# EAGLE board QED_2550 (EAGLE 5.11)
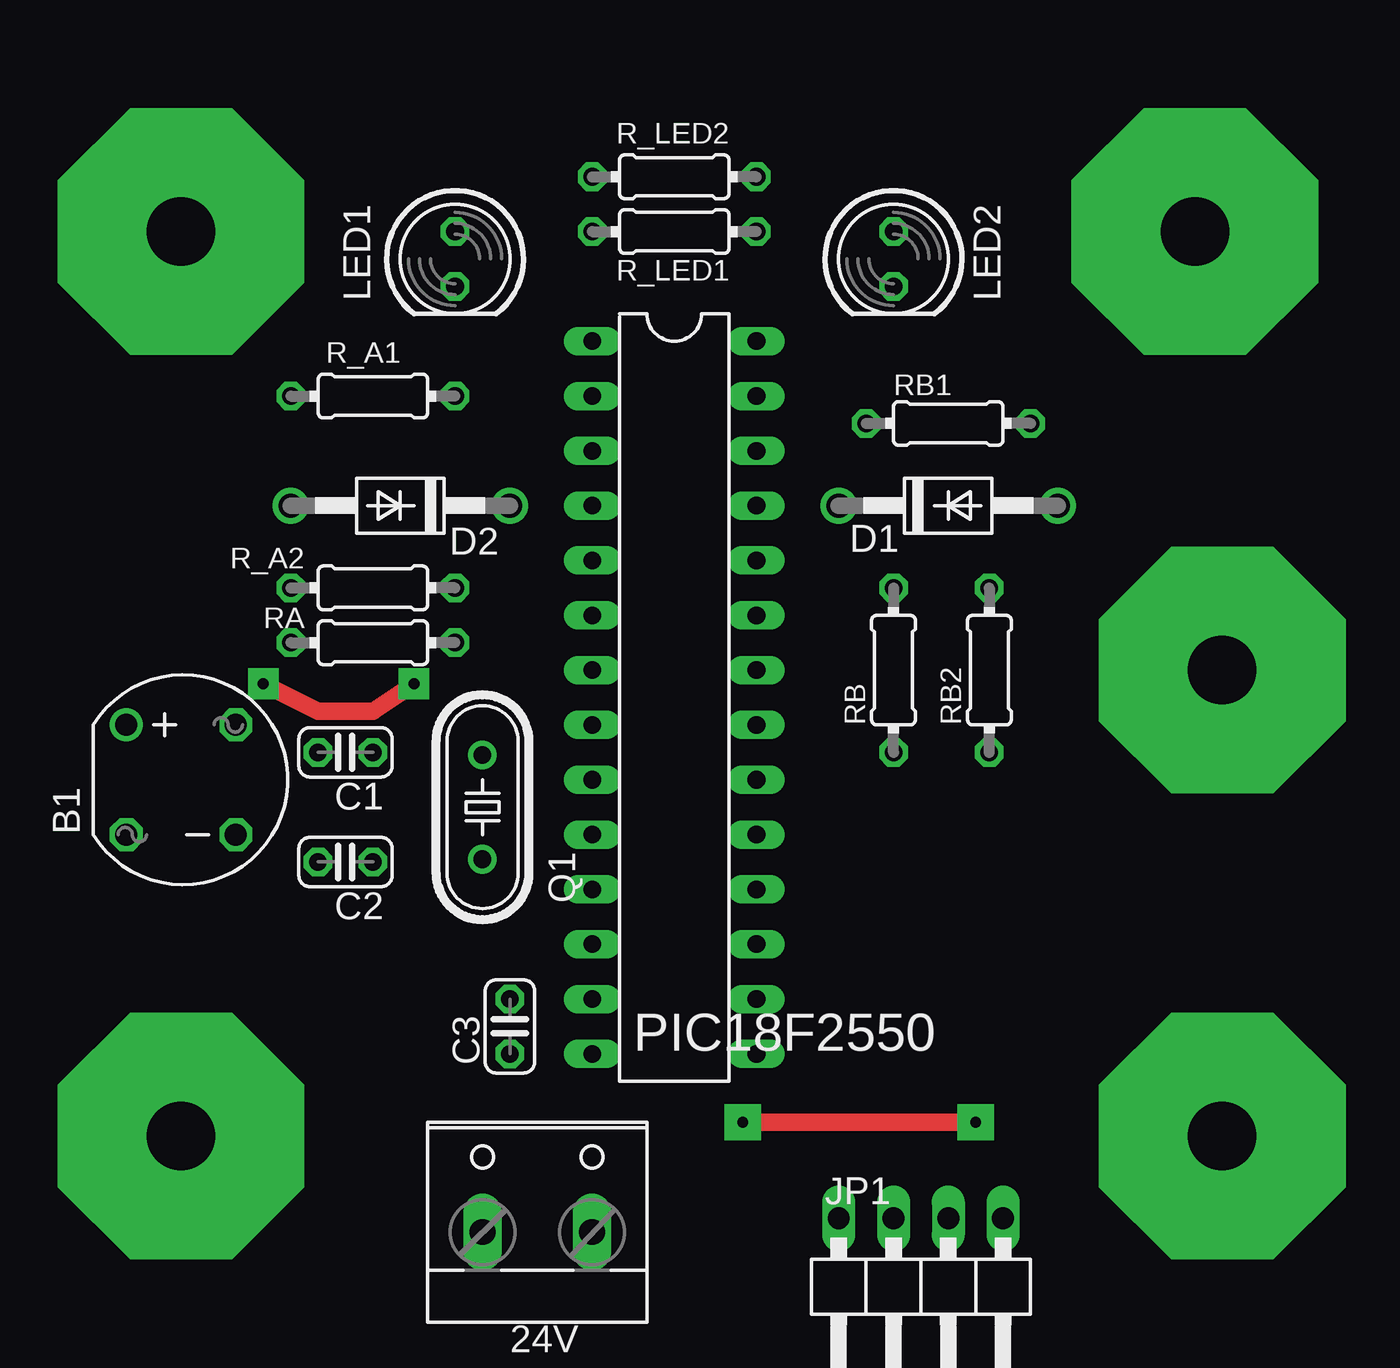
[diagram p0: board, top side]
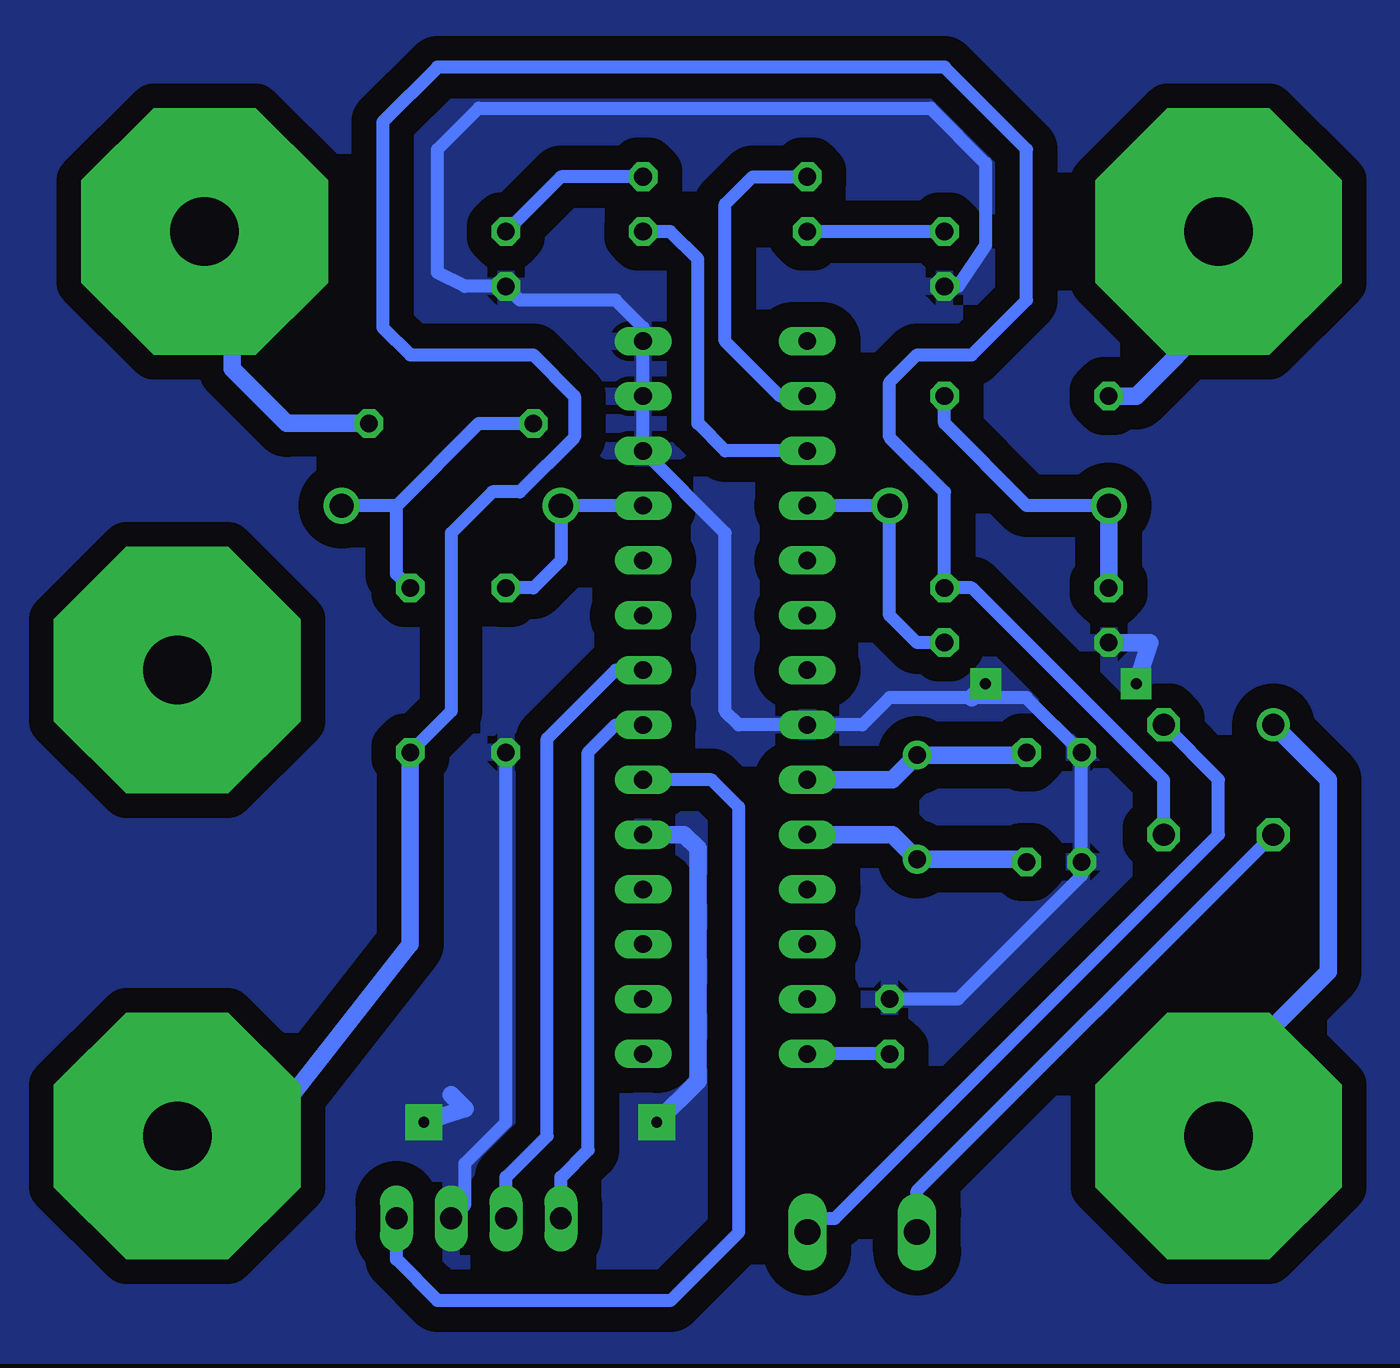
[diagram p1: board, bottom side, seen from below]

No outline drawn. Coordinates in mm, seen from the top.
Copper layers (1*16): Top 0.035mm / dielectric 1.5mm / Bottom 0.035mm
Design rules "default *": minimum track width 10mil, minimum drill 24mil, track to track 45mil, track to pad 45mil, pad to pad 45mil, via to via 45mil, smd to smd 45mil, copper to edge 40mil, drill to drill 8mil, minimum pad ring 10mil, minimum via ring 8mil, stop-mask expansion 4mil, vias tented up to drill 0mil, thermal gap 10mil

## Footprints (pad centres in the part's own frame; a part is rotated, then mirrored left to right if it is on the bottom)
BANA_PLUG = drill 3.175 pad 11.43 octagon: P$1 0,0
W237-132 = drill 1.194 long: 1 -2.54,-0.635; 2 2.54,-0.635
RB1A = drill 1.016 round: + -2.54,2.54 | drill 1.016 octagon: - 2.54,-2.54; AC1 2.54,2.54; AC2 -2.54,-2.54
C025-024X044 = drill 0.813 octagon: 1 -1.27,0; 2 1.27,0
DO41-10 = drill 1.118 round: A 5.08,0; C -5.08,0
1X04/90 = drill 1.016 long: 1 -3.81,-3.81; 2 -1.27,-3.81; 3 1.27,-3.81; 4 3.81,-3.81
LED5MM = drill 0.813 octagon: A -1.27,0; K 1.27,0
DIL28-3 = drill 0.813 long: 1 -16.51,-3.81; 2 -13.97,-3.81; 3 -11.43,-3.81; 4 -8.89,-3.81; 5 -6.35,-3.81; 6 -3.81,-3.81; 7 -1.27,-3.81; 8 1.27,-3.81; 9 3.81,-3.81; 10 6.35,-3.81; 11 8.89,-3.81; 12 11.43,-3.81; 13 13.97,-3.81; 14 16.51,-3.81; 15 16.51,3.81; 16 13.97,3.81; 17 11.43,3.81; 18 8.89,3.81; 19 6.35,3.81; 20 3.81,3.81; 21 1.27,3.81; 22 -1.27,3.81; 23 -3.81,3.81; 24 -6.35,3.81; 25 -8.89,3.81; 26 -11.43,3.81; 27 -13.97,3.81; 28 -16.51,3.81
HC49/S = drill 0.813 round: 1 -2.413,0; 2 2.413,0
0204/7 = drill 0.813 octagon: 1 -3.81,0; 2 3.81,0

## Placement (x,y rotation side)
0V  BANA-PCBOARD-CONNECTOR  [BANA_PLUG]  55.88,8.89 0 top
24  BANA-PCBOARD-CONNECTOR  [BANA_PLUG]  7.62,8.89 0 top
24V  [W237-132]  24.13,5.08 0 top
A  BANA-PCBOARD-CONNECTOR  [BANA_PLUG]  54.61,50.8 0 top
B  BANA-PCBOARD-CONNECTOR  [BANA_PLUG]  7.62,50.8 0 top
B1  [RB1A]  7.62,25.4 0 top
C1  [C025-024X044]  15.24,26.67 180 top
C2  [C025-024X044]  15.24,21.59 180 top
C3  [C025-024X044]  22.86,13.97 90 top
D1  1N4004  [DO41-10]  43.18,38.1 0 top
D2  1N4004  [DO41-10]  17.78,38.1 180 top
JP1  [1X04/90]  41.91,1.27 180 top
LED1  [LED5MM]  20.32,49.53 270 top
LED2  [LED5MM]  40.64,49.53 270 top
PIC18F2550  PIC18F2480-I/SP  [DIL28-3]  30.48,29.21 270 top
Q1  4MHz  [HC49/S]  21.59,24.13 90 top
R_A1  [0204/7]  16.51,43.18 180 top
R_A2  [0204/7]  16.51,34.29 180 top
R_LED1  330  [0204/7]  30.48,50.8 180 top
R_LED2  330  [0204/7]  30.48,53.34 180 top
RA  [0204/7]  16.51,31.75 0 top
RB  [0204/7]  40.64,30.48 90 top
RB1  [0204/7]  43.18,41.91 0 top
RB2  [0204/7]  45.09,30.48 90 top
U$5  BANA-PCBOARD-CONNECTOR  [BANA_PLUG]  55.88,30.48 0 top

## Library data of the parts
0V 24 A B U$5 = banana-plug
24V = con-wago-508; OC_FARNELL: unknown; OC_NEWARK: unknown
B1 = rectifier
C1-C3 R_A1 R_A2 R_LED1 R_LED2 RA RB RB1 RB2 = rcl
D1 D2 = diode
JP1 = pinhead
LED1 LED2 = led
PIC18F2550 = microchip; MF: MICROCHIP; MPN: PIC18F2480-I/SP; OC_FARNELL: 9321217; OC_NEWARK: 71J7237
Q1 = crystal; OC_FARNELL: 1667008; OC_NEWARK: unknown

## Nets
GND: C1.2 C2.2 C3.2 JP1.2 LED1.K LED2.K PIC18F2550.8 PIC18F2550.19 PIC18F2550.26 PIC18F2550.27 PIC18F2550.28 RA.1 RB.1
GND2: 0V.P$1 B1.- R_A2.1 RB2.1
N$1: C1.1 PIC18F2550.9 Q1.2
N$2: C2.1 PIC18F2550.10 Q1.1
N$3: C3.1 PIC18F2550.14
N$4: PIC18F2550.2 R_LED2.2
N$5: LED2.A R_LED2.1
N$6: PIC18F2550.3 R_LED1.1
N$7: LED1.A R_LED1.2
N$8: D1.A RB1.1 RB2.2
N$9: D1.C PIC18F2550.25 RB.2
N$10: D2.A R_A1.1 R_A2.2
N$11: D2.C PIC18F2550.4 RA.2
N$13: 24V.2 B1.AC1
N$14: 24V.1 B1.AC2
N$15: JP1.3 PIC18F2550.22
N$16: B.P$1 R_A1.2
N$17: A.P$1 RB1.2
N$18: JP1.4 PIC18F2550.21
VCC: JP1.1 PIC18F2550.20
VDD: 24.P$1 B1.+

## Tracks (layer width: path | path; a pad name or v marks a point on that pad's centre or on a via)
GND  (via drill 0.5 pad 1.42, 0.5 pad 1.68)
  Top 0.813: v33.66,9.53 v44.45,9.53 | v11.43,29.84 13.97,28.57 16.51,28.57 v18.41,29.84
  Bottom 0.61: LED1.K 19.68,48.26 18.41,50.16 18.41,53.98 20.95,56.52 41.91,56.52 43.81,54.61 43.81,48.9 42.55,48.26 LED2.K 40.01,47.62 35.56,47.62 34.29,46.35 PIC18F2550.28 PIC18F2550.27 PIC18F2550.26 30.48,36.83 30.48,28.57 29.84,27.94 PIC18F2550.8 24.13,27.94 22.86,29.21 19.05,29.21 16.51,29.21 C1.2 C2.2 13.97,20.95 19.68,15.24 C3.2 | RB.1 40.64,9.53 42.55,7.62 42.55,5.71 JP1.2
  Bottom 0.813: PIC18F2550.19 32.38,22.86 31.75,22.23 31.75,11.43 v33.66,9.53 | v44.45,9.53 42.55,10.16 43.18,10.79 | RA.1 10.79,31.75 v11.43,29.84 | 19.05,29.21 v18.41,29.84
  pour Bottom: -1.27,-1.27 -1.27,66.67 65.41,67.31 65.41,-1.27
GND2
  Bottom 0.61: B1.- 10.16,25.4 19.05,34.29 R_A2.1 20.32,38.73 22.86,41.27 22.86,43.81 21.59,45.09 19.05,45.09 16.51,47.62 16.51,54.61 20.32,58.42 43.81,58.42 46.35,55.88 46.35,46.35 45.09,45.09 39.37,45.09 37.47,43.18 37.47,41.27 40.01,38.73 41.27,38.73 43.18,36.83 43.18,28.57 RB2.1
  Bottom 0.813: 0V.P$1 52.07,8.89 45.09,17.78 RB2.1
N$1
  Bottom 0.61: C1.1 16.64,26.54
  Bottom 0.813: PIC18F2550.9 22.73,25.4 Q1.2 16.64,26.54
N$2
  Bottom 0.61: C2.1 16.64,21.72
  Bottom 0.813: PIC18F2550.10 22.73,22.86 Q1.1 16.64,21.72
N$3
  Bottom 0.61: C3.1 PIC18F2550.14
N$4
  Bottom 0.61: PIC18F2550.2 27.94,43.18 30.48,45.72 30.48,52.07 29.21,53.34 R_LED2.2
N$5
  Bottom 0.61: R_LED2.1 38.1,53.34 LED2.A
N$6
  Bottom 0.61: PIC18F2550.3 30.48,40.64 31.75,41.91 31.75,49.53 33.02,50.8 R_LED1.1
N$7
  Bottom 0.61: LED1.A R_LED1.2
N$8
  Bottom 0.61: RB1.1 41.91,41.91 45.72,38.1 | 45.72,38.1 D1.A | RB2.2 45.72,34.92 45.72,38.1
N$9
  Bottom 0.61: PIC18F2550.25 D1.C 38.1,35.56 39.37,34.29 RB.2
N$10
  Bottom 0.61: R_A1.1 20.32,41.91 16.51,38.1 D2.A
  Bottom 0.813: R_A2.2 D2.A
N$11
  Bottom 0.61: RA.2 21.59,31.75 22.86,33.02 D2.C PIC18F2550.4
N$13
  Bottom 0.61: B1.AC1 7.62,25.4 7.62,22.86 25.4,5.08 26.04,5.08 24V.2
N$14
  Bottom 0.61: B1.AC2 21.59,6.35 24V.1
N$15
  Bottom 0.61: JP1.3 40.64,6.99 38.73,8.89 38.73,27.3 35.56,30.48 PIC18F2550.22
N$16
  Bottom 0.61: 7.62,46.99 B.P$1
  Bottom 0.813: 7.62,46.99 11.43,43.18 R_A1.2
N$17
  Bottom 0.61: 53.34,49.53 A.P$1
  Bottom 0.813: RB1.2 50.8,41.91 53.34,44.45 53.34,49.53
N$18
  Bottom 0.61: JP1.4 38.1,6.99 36.83,8.26 36.83,26.67 35.56,27.94 PIC18F2550.21
VCC
  Bottom 0.61: JP1.1 45.72,3.17 43.81,1.27 33.02,1.27 29.84,4.45 29.84,24.13 31.11,25.4 PIC18F2550.20
VDD
  Bottom 0.813: 24.P$1 7.62,11.43 2.54,16.51 2.54,25.4 B1.+